# Altium PCB LV1.PCBDOC
Units mm, origin at the board's own origin, x right, y up, seen from the top; angles counter-clockwise.
Board outline 116.26 x 66.29 mm, 2 copper layers (Component Side, Bottom Layer), stack 0.325 mm thick; 98 components, 63 nets, 316 pads, 91 vias.
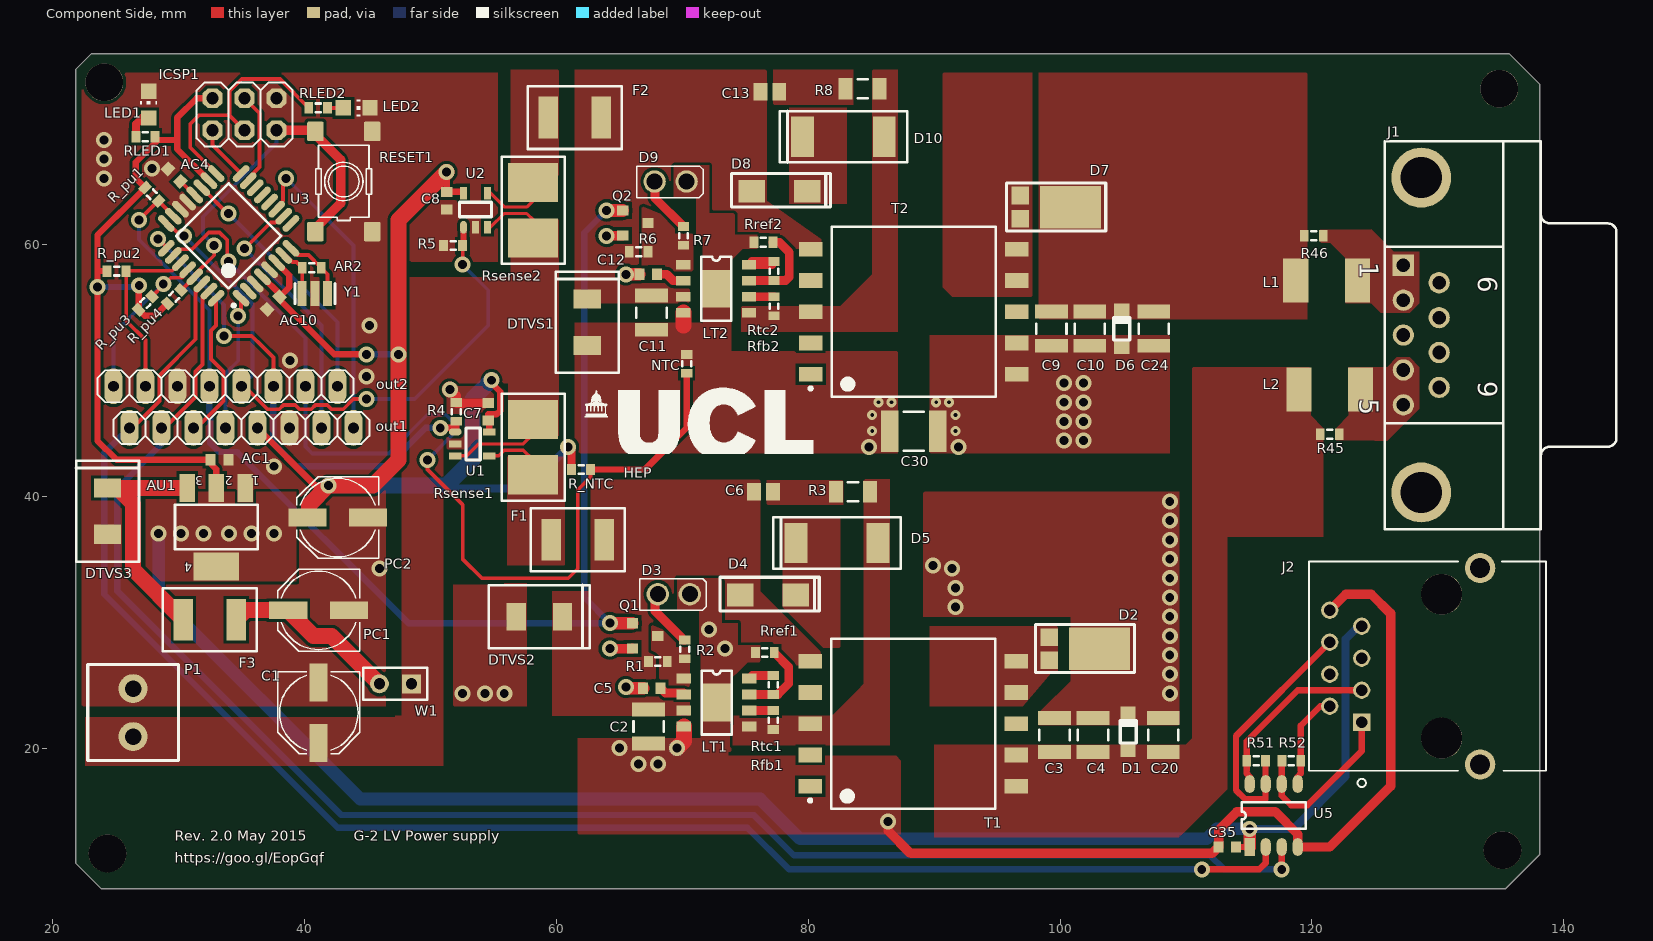
[diagram p0: Component Side view]
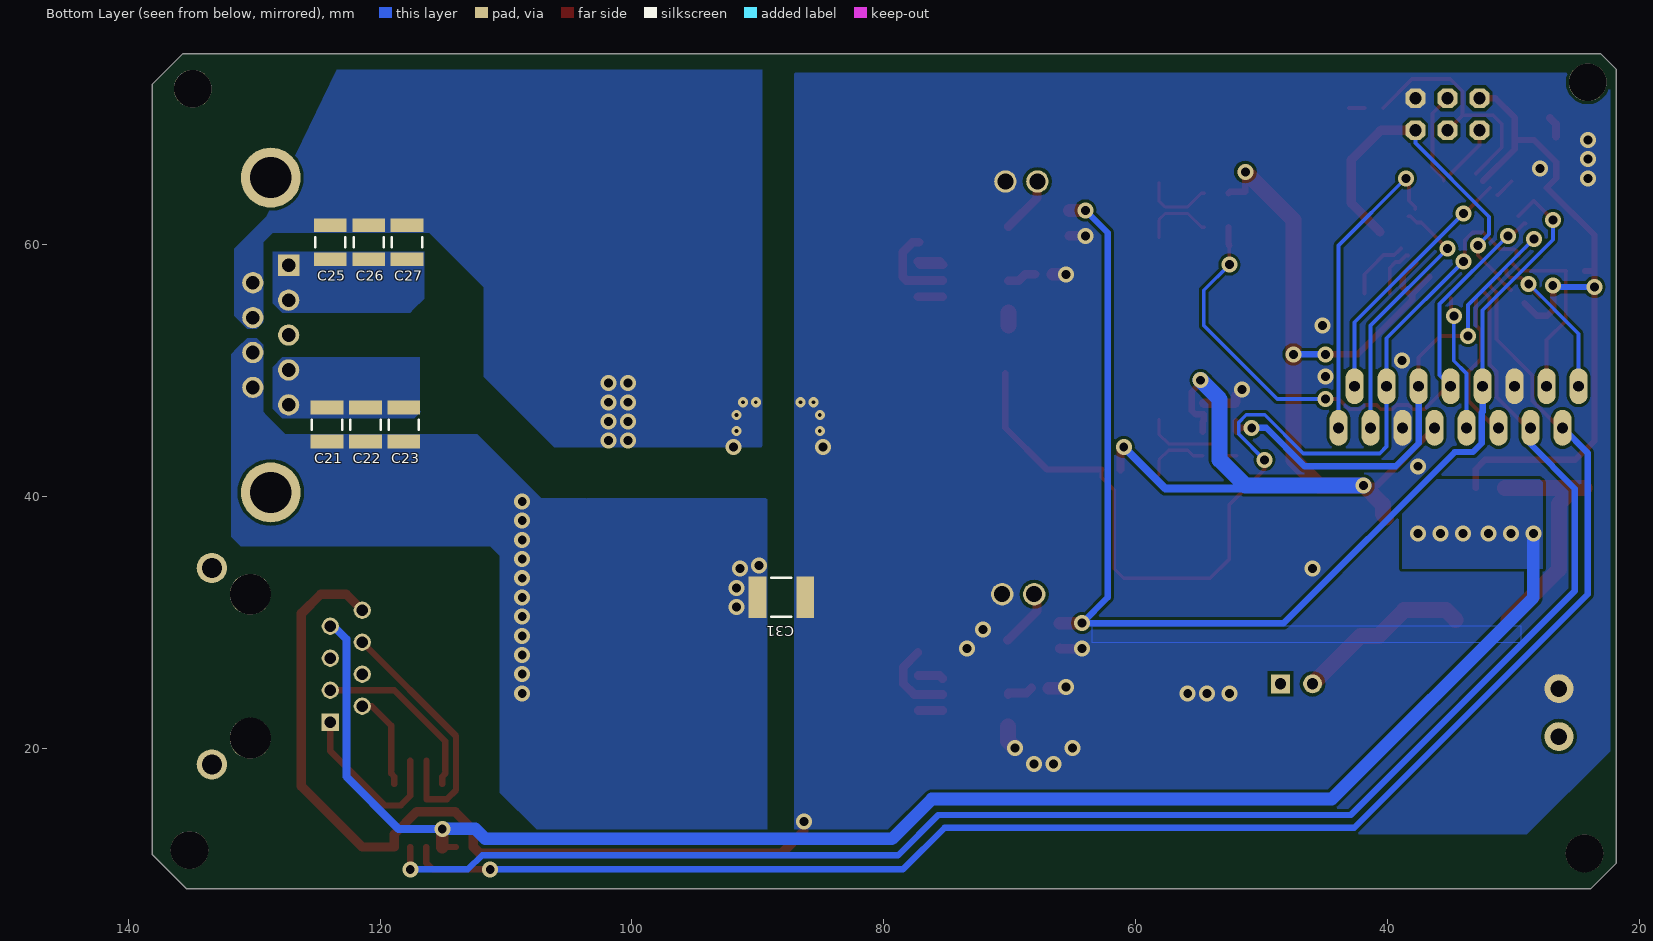
[diagram p1: Bottom Layer view, seen from below]

## Layer stack, top to bottom
Top Solder: solder mask 0.0102, Solder Resist, Dk 3.5
Component Side: signal copper 0.0356
Dielectric 1: core 0.254, FR-4, Dk 4.2
Bottom Layer: signal copper 0.0356
Solder Side: solder mask 0.0102, Solder Resist, Dk 3.5

## Board outline
21.844,10.922 21.844,73.914 23.114,75.184 135.636,75.184 138.102,72.718 138.102,11.61 135.382,8.89 23.876,8.89

## Design rules (kind name [scope] priority, off if disabled: settings)
Clearance [All] p1: gap=0.25
FabricationTestPointUsage TestPointUsage [All] p1: valid=0 allowmultiple=FALSE
FabricationTestpoint Testpoint [All] p1: side=3 testpointundercomponent=TRUE minsize=1.016 maxsize=2.54 preferedsize=1.524 minholesize=0.508 maxholesize=1.016 preferedholesize=0.813 testpointgrid=0.025 allowsidetop=TRUE allowsidebottom=TRUE usegrid=TRUE gridtolerance=0
PlaneClearance [All] p1: clearance=0.254
PolygonConnect [All] p1: connectstyle=Direct reliefconductorwidth=0.254 reliefentries=4 polygonreliefangle="90 Angle" airgapwidth=0.254
RoutingVias [All] p1: holewidth=0.711 width=1.27 viastyle="Through Hole" minholewidth=0.711 minwidth=1.27 maxholewidth=0.711 maxwidth=1.27
SilkToSolderMaskClearance SilkscreenOverComponentPads [IsPad] p1: minsilkscreentomaskgap=0.254 clearancetoexposedcopper=TRUE
SolderMaskExpansion [All] p1: expansion=0.051
Width Width_1 [InNet('ISENSE_2') OR InNet('ISENSE_1') OR InNet('NEGISENSE_2') OR InNet('NEGISENSE_1') OR InNet('L_OUT+') OR InNet('L_OUT-') OR InNet('NEGL_OUT+') OR InNet('NEGL_OUT-') OR InNet('SW')] p1: maxlimit=2 minlimit=0.254 preferedwidth=1 minimp=50.000000 maximp=50.000000 favimp=50.000000
Width [All] p2: maxlimit=2 minlimit=0.254 preferedwidth=0.254 minimp=50.000000 maximp=50.000000 favimp=50.000000
26 further rules are at their usual default settings.

## Classes and differential pairs
component class LV1: C2 C3 C4 C5 C6 C9 C10 C11 C12 C13 C16 C17 C18 C19 C20 C21 C22 C23 C24 C25 C26 C27 C30 C31 D1 D2 D3 D4 D5 D6 D7 D8 D9 D10 J1 L1 L2 LT1 LT2 Q1 Q2 R1 R2 R3 R6 R7 R8 R9 R10 R45 R46 Rfb1 Rfb2 Rref1 Rref2 Rtc1 Rtc2 T1 T2
component class controller: AC1 AC3 AC4 AC10 AR1 AR2 AU1 C1 C7 C8 C35 DTVS1 DTVS2 DTVS3 F1 F2 F3 ICSP1 J2 LED1 LED2 NTC NTC1 out1 out2 P1 PC1 PC2 R4 R5 R51 R52 R_NTC R_NTC1 R_pu1 R_pu2 R_pu3 R_pu4 RESET1 RLED1 RLED2 Rsense1 Rsense2 U1 U2 U3 U5 W1 Y1

## Components (designator, comment, footprint, x,y, rotation, side; value= is the part's Value field where it differs from the comment)
AC1 "100n" 1608[0603] 33.274,42.926 r180 top (schematic designator AC2)
AC4 "Cap Semi" 1608[0603] 29.678,65.532 r315 top
AC10 "Cap Semi" 1608[0603] 37.552,55.372 r45 top
AR2 "" J1-0603 40.6,58.166 r0 top
AU1 "LM2940IMP-5.0/NOPB" SOT223 33.02,37.592 r180 top
C1 "" PANASONIC_D 41.148,22.86 r270 top
C2 "Cap Semi" C1210 67.34,21.758 r90 top (schematic designator C14)
C3 "Cap Semi" C1210 99.568,21.082 r90 top (schematic designator C18)
C4 "Cap Semi" C1210 102.616,21.082 r90 top (schematic designator C17)
C5 "Cap Semi" 1608[0603] 67.594,24.806 r180 top (schematic designator C15)
C6 "Cap Semi" C0805 76.454,40.386 r180 top (schematic designator C16)
C7 "Cap Semi" 1608[0603] 54.61,46.736 r270 top (schematic designator C21)
C8 "Cap Semi" 1608[0603] 51.308,63.5 r90 top (schematic designator C20)
C9 "Cap Semi" C1210 99.314,53.34 r90 top (schematic designator C5)
C10 "Cap Semi" C1210 102.362,53.34 r90 top (schematic designator C6)
C11 "Cap Semi" C1210 67.564,54.61 r90 top (schematic designator C2)
C12 "Cap Semi" 1608[0603] 67.31,57.658 r180 top (schematic designator C3)
C13 "Cap Semi" C0805 76.962,72.136 r180 top (schematic designator C4)
C20 "Cap Semi" C1210 108.204,21.082 r90 top
C21 "Cap Semi" C1210 124.206,45.72 r270 bottom
C22 "Cap Semi" C1210 121.158,45.72 r270 bottom
C23 "Cap Semi" C1210 118.11,45.72 r270 bottom
C24 "Cap Semi" C1210 107.442,53.34 r90 top
C25 "Cap Semi" C1210 123.952,60.198 r270 bottom
C26 "Cap Semi" C1210 120.904,60.198 r270 bottom
C27 "Cap Semi" C1210 117.856,60.198 r270 bottom
C30 "Cap Semi" 1812 88.392,45.212 r0 top
C31 "Cap Semi" 1812 88.138,32.004 r0 bottom
C35 "Cap Semi" 1608[0603] 113.284,12.192 r0 top
D1 "BZT52H-B5V6" SOD123F 105.41,21.336 r270 top (schematic designator D10)
D2 "PDS1040L" PDS1040L 103.124,27.94 r270 top
D3 "LED0" LED-0 69.342,32.258 r180 top
D4 "SMAJ30A" DO-214AC 76.818,32.204 r180 top (schematic designator D7)
D5 "ES3B" DO-214AB 82.296,36.322 r0 top (schematic designator D8)
D6 "BZT52H-B5V6" SOD123F 104.902,53.34 r270 top (schematic designator D1)
D7 "PDS1040L" PDS1040L 100.838,62.992 r270 top
D8 "SMAJ30A" DO-214AC 77.724,64.262 r180 top (schematic designator D3)
D9 "LED0" LED-0 69.088,65.024 r180 top
D10 "ES3B" DO-214AB 82.804,68.58 r0 top (schematic designator D4)
DTVS1 "SMBJ24A-E3/52" DO-214AA 62.484,53.848 r270 top (schematic designator DTVS)
DTVS2 "SMBJ" DO-214AA 58.674,30.48 r180 top
DTVS3 "SMBJ" DO-214AA 24.384,38.862 r270 top
F1 "MINISMDC050F-2" MF-MSMF1 61.722,36.576 r0 top (schematic designator F2)
F2 "MF-MSMF075-2" MF-MSMF1 61.468,70.104 r0 top (schematic designator F1)
F3 "MINISMDC050F-2" MF-MSMF1 32.512,30.226 r180 top
ICSP1 "3x2 M" 2X03 35.266,70.358 r0 top (schematic designator ICSP)
J1 "D Connector 9" DSUB1.385-2H9 138.176,52.832 r270 top (schematic designator J3)
J2 "CONNECTOR, RJ45, JACK, 8P8C, 1PORT, CAT5E" MOLEX_85505-5113 123.952,22.098 r90 top
L1 "Inductor" MPLC0730 121.158,57.15 r180 top
L2 "Inductor" MPLC0730 121.412,48.514 r180 top
LED1 "GREEN" CHIP-LED0805 27.646,71.12 r0 top
LED2 "GREEN" CHIP-LED0805 44.156,70.866 r270 top
LT1 "LT8302" S8E 70.134,25.568 r0 top (schematic designator LT8302_2)
LT2 "LT8302" S8E 70.104,58.42 r0 top (schematic designator LT8302)
NTC "" J1-0603 70.358,50.546 r270 top
out1 "" 1X08 35.012,45.466 r0 top
out2 "" 1X08 33.742,48.768 r0 top
P1 "WiretoBoard" MC000044 26.416,22.86 r90 top
PC1 "<B>POLARIZED CAPACITOR</B>, European symbol" PANASONIC_D 41.148,30.988 r180 top
PC2 "<B>POLARIZED CAPACITOR</B>, European symbol" PANASONIC_D 42.672,38.354 r180 top
Q1 "BSS131" SOT-23#1 67.056,28.956 r180 top (schematic designator Q2)
Q2 "BSS131" SOT-23#1 66.294,61.722 r180 top (schematic designator Q1)
R1 "Res3" J1-0603 68.072,26.924 r180 top (schematic designator R13)
R2 "Res3" J1-0603 70.214,27.886 r270 top (schematic designator R14)
R3 "Res3" C1206 83.566,40.386 r180 top (schematic designator R15)
R4 "Res3" J1-0603 52.07,46.736 r270 top (schematic designator R17)
R5 "Res3" J1-0603 51.816,59.944 r0 top (schematic designator R8)
R6 "Res3" J1-0603 66.548,59.436 r180 top (schematic designator R1)
R7 "Res3" J1-0603 70.104,60.706 r270 top (schematic designator R2)
R8 "Res3" C1206 84.328,72.39 r180 top (schematic designator R3)
R45 "Res3" J1-0603 121.412,44.958 r0 top
R46 "Res3" J1-0603 120.142,60.706 r0 top
R51 "" J1-0603 115.57,19.05 r180 top
R52 "" J1-0603 118.364,19.05 r180 top
R_NTC "" J1-0603 61.976,42.164 r180 top
R_pu1 "pullup" J1-0603 27.9,64.008 r135 top (schematic designator R_pu)
R_pu2 "pullup" J1-0603 25.106,57.912 r180 top
R_pu3 "pullup" J1-0603 27.392,55.372 r225 top
R_pu4 "pullup" J1-0603 29.678,55.88 r225 top
RESET1 "" B3S-1002 43.14,65.024 r90 top
Rfb1 "Res3" J1-0603 77.246,22.266 r270 top (schematic designator Rfb2)
Rfb2 "Res3" J1-0603 77.299,55.118 r270 top (schematic designator Rfb)
RLED1 "" J1-0603 27.392,68.58 r180 top (schematic designator RLED)
RLED2 "" J1-0603 41.108,70.866 r180 top
Rref1 "Res3" J1-0603 76.564,27.632 r180 top (schematic designator Rref2)
Rref2 "Res3" J1-0603 76.454,60.198 r180 top (schematic designator Rref)
Rsense1 "Rsense" R6432 58.166,43.942 r270 top
Rsense2 "Rsense" R6432 58.166,62.738 r90 top
Rtc1 "Res3" J1-0603 77.246,25.06 r270 top (schematic designator Rtc2)
Rtc2 "Res3" J1-0603 77.299,57.912 r270 top (schematic designator Rtc)
T1 "36V" EP13 88.34,21.978 r180 top (schematic designator T2)
T2 "36V" EP13 88.38,54.69 r180 top (schematic designator T1)
U1 "INA138" SOT-23#2 53.34,44.196 r270 top (schematic designator U3)
U2 "INA138" SOT-23#2 53.594,62.738 r0 top
U3 "ATmega328P-AU" 32A_N 33.996,60.706 r135 top
U5 "SP3084EEN-L" SOICN8 115.062,12.192 r90 top
W1 "Jumper" HDR1X2 48.514,25.146 r180 top
Y1 "" RESONATOR 40.854,56.134 r180 top (schematic designator Y2)

## Footprints (in the part's own frame and the unit in brackets; to place one, negate y for a bottom-side part, rotate by r counter-clockwise, add the part's x,y. Pads: shape width x height; smd on the part's side, far side on the other; paste and mask are expansions set on the pad)
1X08 [mil]
  oval 56x112 hole 34: 1(-350,0) 2(-250,0) 3(-150,0) 4(-50,0) 5(50,0) 6(150,0) 7(250,0) 8(350,0)
  silkscreen extent -400,-50 400,50
2X03 [mil]
  oct 62x62 hole 38: 1(-100,-50) 2(-100,50) 3(0,-50) 4(0,50) 5(100,-50) 6(100,50)
  silkscreen extent -150,-100 150,100
32A_N [mm] "Thin QFP, 32-Leads, Body 7x7mm, Pitch 0.8mm, IPC Medium Density"
  oval 1.65x0.55 smd: 1(-4.2,2.8) 2(-4.2,2) 3(-4.2,1.2) 4(-4.2,0.4) 5(-4.2,-0.4) 6(-4.2,-1.2) 7(-4.2,-2) 8(-4.2,-2.8) 17(4.2,-2.8) 18(4.2,-2) 19(4.2,-1.2) 20(4.2,-0.4) 21(4.2,0.4) 22(4.2,1.2) 23(4.2,2) 24(4.2,2.8)
  oval 0.55x1.65 smd: 9(-2.8,-4.2) 10(-2,-4.2) 11(-1.2,-4.2) 12(-0.4,-4.2) 13(0.4,-4.2) 14(1.2,-4.2) 15(2,-4.2) 16(2.8,-4.2) 25(2.8,4.2) 26(2,4.2) 27(1.2,4.2) 28(0.4,4.2) 29(-0.4,4.2) 30(-1.2,4.2) 31(-2,4.2) 32(-2.8,4.2)
  silkscreen extent -4.32,-2.95 2.95,3.75, body extent -3.5,-3.5 3.5,3.5, height 1.2
1608[0603] [mm] "Chip Capacitor, Body 1.6x0.8mm, IPC High Density"
  rect 0.8x0.9 smd: 1(-0.7,0) 2(0.7,0)
  body extent -0.87,-0.48 0.87,0.48, height 1.3
1812 [mm] "Chip Capacitor, Body 4.5x3.2mm, IPC High Density"
  rect 1.4x3.3 smd: 1(-1.9,0) 2(1.9,0)
  silkscreen extent -0.8,-1.55 0.8,1.55, body extent -2.4,-1.7 2.4,1.7, height 1.4
B3S-1002 [mm]
  rrect15% 1.55x1.3 smd: 1(3.975,-2.25) 2(-3.975,-2.25) 3(3.975,2.25) 4(-3.975,2.25)
  silkscreen extent -3.1,-2.2 2.87,2.21
C0805 [mm] "Chip Capacitor, Body 2.0x1.3mm, IPC High Density"
  rect 1.1x1.4 smd: 1(-0.75,0) 2(0.75,0)
  body extent -1.1,-0.72 1.1,0.72, height 1.4
C1206 [mm] "Chip Capacitor, Body 3.2x1.6mm, IPC High Density"
  rect 1.1x1.7 smd: 1(-1.35,0) 2(1.35,0)
  silkscreen extent -0.4,-0.75 0.4,0.75, body extent -1.7,-0.9 1.7,0.9, height 1.3
C1210 [mm] "Chip Capacitor, Body 3.2x2.5mm, IPC High Density"
  rect 1.1x2.6 smd: 1(-1.35,0) 2(1.35,0)
  silkscreen extent -0.4,-1.2 0.4,1.2, body extent -1.7,-1.35 1.7,1.35, height 1.3
CHIP-LED0805 [mil]
  rect 48x48 smd: A(0,-41.34) C(0,42)
  silkscreen extent -27,0 27,12
DO-214AA [mm]
  rect 1.52x2.18 smd: 1(-1.84,0) 2(1.84,0)
  silkscreen extent -4.01,-2.5 4.01,2.5
DO-214AB [mm]
  rect 1.8x3.2 smd: 1(-3.25,0) 2(3.25,0)
  silkscreen extent -5.05,-2.03 5.05,2.03
DO-214AC [mm] "LED; 2 Leads"
  rect 2.1x1.8 smd: 1(2.2,0) 2(-2.2,0)
  silkscreen extent -4.06,-1.4 3.81,1.27
DSUB1.385-2H9 [mm] "Connector; D Subminiature; 9 Position; Right Angle; Pitch 1.385 mm"
  rect 1.69x1.69 hole 1.09: 1(-5.54,-10.92)
  round 1.69 hole 1.09: 2(-2.77,-10.92) 3(0,-10.92) 4(2.77,-10.92) 5(5.54,-10.92) 6(-4.155,-8.08) 7(-1.385,-8.08) 8(1.385,-8.08) 9(4.155,-8.08)
  round 4.76 hole 3.26: 10(-12.495,-9.5) 11(12.495,-9.5)
  silkscreen extent -15.4,-12.4 15.4,6, body extent -15.28,-12.85 15.53,6.22, height 12.55
EP13 [mm] "SMD, 10-Leads, Body 13.5x14.0mm (max), Pitch 2.48mm, IPC Medium Density"
  rect 1.88x1.17 smd: 1(8.18,4.96) 2(8.18,2.48) 3(8.18,0) 4(8.18,-2.48) 5(8.18,-4.96) 6(-8.18,-4.96) 7(-8.18,-2.48) 8(-8.18,0) 9(-8.18,2.48) 10(-8.18,4.96)
  silkscreen extent -6.5,-6.75 8.3,6.75, body extent -8.88,-6.75 8.87,6.75, height 12.5
HDR1X2 [mm] "Connector; Header; 2 Position"
  rect 1.5x1.5 hole 0.9: 1(0,0)
  round 1.5 hole 0.9: 2(2.54,0)
  silkscreen extent -1.27,-1.27 3.81,1.27
J1-0603 [mm] "Chip Resistor, Body 1.6x0.8mm, IPC High Density"
  rect 0.7x0.9 smd: 1(-0.75,0) 2(0.75,0)
  silkscreen extent -0.2,-0.35 0.2,0.35, body extent -0.85,-0.48 0.85,0.48, height 0.9
LED-0 [mil] "LED; 2 Leads"
  round 70 hole 50: 1(50,0) 2(-50,0)
  silkscreen extent -101,-48 106,50
MC000044 [mm]
  round 2.3 hole 1.3: 1(-1.905,0) 2(1.905,0)
  silkscreen extent -3.81,-3.6 3.81,3.6
MF-MSMF1 [mm]
  rect 1.55x3.3 smd: 1(-2.1,0) 2(2.1,0)
  silkscreen extent -3.72,-2.5 3.73,2.5
MOLEX_85505-5113 [mil]
  round 128 hole 128: 0(-50,-250) 0(400,-250)
  rect 54x54 hole 36: 1(0,0)
  round 54 hole 36: 2(50,100) 3(100,0) 4(150,100) 5(200,0) 6(250,100) 7(300,0) 8(350,100)
  round 94.5 hole 63: M1(-131.89,-370.08) M2(482,-370.08)
  silkscreen extent -203,-576 502,165, body extent -149,-580 505,160, height 512
MPLC0730 [mm]
  rect 2x3.5 smd: 1(2.45,0) 2(-2.45,0)
  body extent -3.18,-2.67 3.18,2.79, height 2
PANASONIC_D [mil]
  rect 119x56 smd: 1(95,0) 2(-94.49,0)
  silkscreen extent -128,-128 128,128, body extent -130,-125 125,125, height 236
PDS1040L [mm]
  rect 1.39x1.4 smd: 1(-0.92,-3.982) 1(0.92,-3.982)
  rect 3.36x4.86 smd: 2(0,0)
  silkscreen extent -1.91,-5.08 1.91,2.79, body extent -1.52,-4.06 1.52,2.29, height 1
R6432 [mm]
  rect 3.1x4 smd: 1(-2.2,0) 2(2.2,0)
  silkscreen extent -4.25,-2.5 4.25,2.5
RESONATOR [mil]
  rect 28x79 smd: 1(-39.37,0) 2(0,0) 3(40,0)
  silkscreen extent -63,-31 63,32
S8E [mil]
  rect 45x30 smd: 1(0,0) 2(0,-50) 3(0,-100) 4(0,-150) 5(205,-150) 6(205,-100) 7(205,-50) 8(205,0)
  rect 89x118 smd: 4(102.5,-75)
  silkscreen extent 55,-175 149,25
SOD123F [mm]
  rect 1.2x1.2 smd: 1(-1.4,0) 2(1.4,0)
  silkscreen extent -1.02,-0.64 0.89,0.64
SOICN8 [mm]
  rect 1.4x0.8 smd: 1(0,0)
  oval 1.4x0.8 smd: 2(0,-1.27) 3(0,-2.54) 4(0,-3.81) 5(5,-3.81) 6(5,-2.54) 7(5,-1.27) 8(5,0)
  silkscreen extent 1.43,-4.44 3.57,0.64, body extent -0.38,-4.7 5.46,0.89, height 1
SOT223 [mil]
  rect 48x88 smd: 1(-91,-122) 2(0,-122) 3(91,-122)
  rect 142x87 smd: 4(0,123)
  silkscreen extent -129,-70 129,70
SOT-23#1 [mm]
  rect 0.9x0.8 smd: 1(1,-1) 2(1,1) 3(-1,0)
  body extent -0.89,-1.02 1.02,1.14, height 0.5
SOT-23#2 [mm]
  oval 0.55x1 smd: 1(-0.95,-1.35)
  rect 0.55x1 smd: 2(0,-1.35) 3(0.95,-1.35) 4(0.95,1.35) 5(-0.95,1.35)
  silkscreen extent -1.27,-0.51 1.27,0.64

## Part data
AC1: library part "Cap Semi", "Capacitor (Semiconductor SIM Model)"
AC4 AC10 C3 C4 C5 C7 C8 C9 C10 C11 C12 C13 C20 C21 C22 C23 C24 C25 C26 C27 C30 C31 C35: "Capacitor (Semiconductor SIM Model)"
AR2 NTC R51 R52 R_NTC R_pu1 R_pu2 R_pu3 R_pu4 RLED1 RLED2: library part Res3, "Resistor"
AU1: library part MC33269ST*, "1469076"
C1 PC1 PC2: library part CPOL-EUD
D1 D6: "Zener Diode"
D2 D7: "Schottky Diode"
D3 D9: "Typical INFRARED GaAs LED"
D4 D8: library part "D Zener", "Zener Diode"
D5 D10: "Power Diode"
DTVS1: library part SMBJ, "TVS"
DTVS2 DTVS3: "TVS"
F1 F2 F3: library part "Fuse 1", "Fuse"
ICSP1: library part PINHD-2X3
J1: "Receptacle Assembly, 9 Position, Right Angle"
J2: library part 85505-5113
LED1 LED2: library part LEDCHIP-LED0805
out1 out2: library part PINHD-1X8
Q1 Q2: "N-Channel MOSFET"
R1 R2 R3 R4 R5 R6 R7 R8 R45 R46 Rfb1 Rfb2 Rref1 Rref2 Rtc1 Rtc2: "Resistor"
RESET1: library part TS42
Rsense1 Rsense2: "CRF2512-FV-R001ELF"
T1: library part "WE-FB, 750311457", "Flyback Transformer"
T2: library part "WE-FB, 750311457", "Flyback Transformer suitable or LT3573/ LT3574/ LT3575/ LT3748 WE-FB, Ui=36V"
U3: "8-bit AVR Microcontroller, 32KB Flash, 1KB EEPROM, 2KB SRAM, 32-pin TQFP, Industrial Grade (-40°C to 85°C)"
W1: library part "Header 2", "Header, 2-Pin"
Y1: library part RESONATORMU

## Free pads (board coordinates)
  round 3 hole 3 unplated: 1(24.13,72.898) 1(24.384,11.684) 1(134.874,72.39) 1(135.128,11.938)

## Via types
v1: diameter 1.27, hole 0.711, Component Side to Bottom Layer, 83 vias
v2: diameter 0.8, hole 0.3, Component Side to Bottom Layer, 8 vias

## Nets (pads, with @x,y where several pads share a name; then routed paths per layer and width w, separated by ;. In a path a pad name is that pad's centre, name@x,y a point inside that pad or via, vN(x,y) a via of type N, cw(c..) or ccw(c..) an arc to the next point about the centre after c; other vN are vias at no path point)
24V+: C11.2 C13.2 D8.1 DTVS1.1 F2.2 LT2.3 R6.2 T2.5
24V-: C2.2 C6.2 D4.1 DTVS2.1 F1.2 LT1.3 R1.2 T1.5
+5V: AC1.2 AC10.2 AU1.2 AU1.4 C7.2 C8.2 C35.2 ICSP1.2 J2.7 out1.5 PC2.1 R_NTC.2 R_pu1.2 R_pu2.2 R_pu3.2 R_pu4.2 RLED1.1 U1.5 U2.5 U3.4 U3.6 U3.18 U5.1 | length 286.3
  Component Side w0.5: R_pu2.2@24.344,57.912 23.582,57.912 ; 25.106,62.275 R_pu1.2 ; v1(26.903,56.771) 26.857,56.725 26.857,54.847 R_pu3.2 26.862,54.837 27.342,54.356 28.154,54.356 R_pu4.2 ; U3.18 29.932,67.598 29.932,68.326 ; ICSP1.2 31.456,71.628 29.932,70.104 29.932,68.326 ; AU1.2 33.02,42.186 32.28,42.926 25.106,42.926 23.582,44.45 23.582,57.912 ; out1.5 40.854,40.894 v1(41.91,40.894) ; U3.4 38.047,56.089 AC10.2 ; U3.6 38.822,57.577 38.822,56.642 AC10.2 ; v1(44.937,51.308) 42.378,51.308 38.047,55.639 AC10.2 ; v1(51.308,65.786) C8.2 52.532,64.2 U2.5 ; U1.5 54.69,45.956 C7.2 54.61,46.536 55.267,46.536 55.56,46.829 55.56,48.336 54.864,49.032 v1(54.864,49.247) ; C35.2 U5.1 ; 23.582,57.912 23.582,60.751 R_pu1.2 ; R_pu1.2 26.63,65.278 26.63,66.548 28.408,68.326 29.932,68.326
  Component Side w0.635: v1(60.96,43.942) 61.226,43.676 R_NTC.2
  Component Side w1: U5.1 v1(115.062,13.627)
  Component Side w1.27: PC2.1@40.132,38.354 40.386,38.608 40.386,39.37 v1(41.91,40.894) 45.466,40.894 47.498,42.926 v1(47.498,51.308) 47.498,61.976 v1(51.308,65.786)
  Bottom Layer w0.5: v1(23.582,56.642) 26.774,56.642 v1(26.903,56.771) ; v1(44.937,51.308) v1(47.498,51.308) ; v1@54.312,49.247 v1(54.864,49.247)
  Bottom Layer w0.635: 50.546,40.64 57.658,40.64 v1(60.96,43.942) ; v1(115.062,13.627) 118.529,13.627 122.682,17.78 122.682,28.702 123.698,29.718 J2.7
  Bottom Layer w1: v1(28.448,37.084) 28.448,32.004 44.45,16.002 76.2,16.002 79.363,12.839 111.645,12.839 112.433,13.627 v1(115.062,13.627)
  Bottom Layer w1.27: v1(41.91,40.894) 51.308,40.894 53.34,42.926 53.34,47.723 v1(54.864,49.247)
  other v1: 30.226,37.084 32.004,37.084 34.036,37.084 35.814,37.084 37.592,37.084
+LV: C25.2 C26.2 C27.2 J1.1 J1.2 L1.2 R46.2
-LV: C21.1 C22.1 C23.1 J1.4 J1.5 L2.2 R45.2
A3: NTC.2 out2.7 R_NTC.1 U3.26 | length 82.5
  Component Side w0.3: U3.26 29.789,59.15 29.789,59.504 29.933,59.649 31.094,59.649 32.424,60.979 33.282,60.979 33.888,60.373 33.888,58.782 v1(33.996,58.674) ; v1(49.784,42.926) 49.784,42.164 52.578,39.37 52.578,35.052 54.102,33.528 60.96,33.528 61.72,34.288 61.72,40.54 62.726,41.546 R_NTC.1
  Component Side w0.508: R_NTC.1 67.056,42.164 70.358,45.466 NTC.2
  Bottom Layer w0.3: v1(33.996,58.674) 40.092,52.578 out2.7 40.092,43.982 40.64,43.434 46.706,43.434 49.773,46.501 51.229,46.501 51.835,45.895 51.835,44.977 v1(49.784,42.926)
A6: out2.8 U3.19 | length 20.3
  Component Side w0.3: U3.19 33.915,62.484 v1(33.996,62.484)
  Bottom Layer w0.3: v1(33.996,62.484) 42.632,53.848 out2.8
ADC1: out2.5 R5.2 U2.1 U3.24 | length 48.7
  Component Side w0.3: U3.24 29.196,61.696 30.179,60.713 v1(30.468,60.713) ; out2.5 35.263,48.768 37.085,46.946 38.012,46.946 38.355,47.288 39.282,47.288 39.625,46.946 40.552,46.946 40.895,47.288 41.822,47.288 42.165,46.946 43.092,46.946 43.899,47.752 v1(44.958,47.752) ; R5.2 52.578,59.932 v1(52.578,58.42)
  Component Side w0.5: R5.2 52.644,60.022 U2.1
  Bottom Layer w0.3: v1(30.468,60.713) 35.891,55.29 35.891,49.647 out2.5 ; v1(44.958,47.752) 48.768,47.752 54.61,53.594 54.61,56.388 v1(52.578,58.42)
ADC2: out2.6 R4.2 U1.1 U3.25 | length 39.8
  Component Side w0.3: v1(28.408,60.452) 29.046,59.814 U3.25 ; v1(33.635,52.767) 35.839,52.767 36.693,51.913 37.552,51.054 out2.6
  Component Side w0.5: v1(50.8,45.466) 51.67,45.466 U1.1 52.07,45.226 R4.2
  Bottom Layer w0.3: v1(28.408,60.452) 33.635,55.225 v1(33.635,52.767)
  Bottom Layer w0.5: out2.6 37.552,44.236 39.37,42.418 46.609,42.418 49.657,45.466 v1(50.8,45.466)
AREF: AC4.2 U3.20 | length 1.6
  Component Side w0.3: AC4.2 31.251,63.959 U3.20
D2: out1.3 U3.32 | length 12
  Component Side w0.3: out1.3 31.453,45.466 33.583,47.597 33.583,49.939 32.6,50.923 32.6,53.195 33.006,53.602 U3.32
D3: out1.4 U3.1 | length 10.8
  Component Side w0.3: v1(34.758,54.356) 34.986,54.584 U3.1
  Bottom Layer w0.3: out1.4 33.742,49.784 34.758,50.8 v1(34.758,54.356)
D4: U3.2
D5: U3.9
D6: out1.7 U3.10 | length 20.9
  Component Side w0.3: v1(35.266,59.69) 37.339,61.763 37.705,61.763 38.203,62.262 U3.10
  Bottom Layer w0.3: v1(35.266,59.69) 41.362,53.594 out1.7
D7: out1.8 U3.11 | length 24.8
  Component Side w0.3: U3.11 37.814,63.004 38.313,63.502 38.313,65.023 v1(38.568,65.278)
  Bottom Layer w0.3: v1(38.568,65.278) 43.902,59.944 out1.8
EN: out2.4 Q1.1 Q2.1 R_pu1.1 U3.23 | length 99
  Component Side w0.3: v1(26.884,61.976) 28.386,63.478 R_pu1.1 29.612,62.296 U3.23
  Component Side w1: v1(64.008,62.738) 64.024,62.722 Q2.1 ; v1(64.262,29.972) 64.278,29.956 Q1.1
  Bottom Layer w0.3: v1(26.884,61.976) 26.884,60.393 32.472,54.805 out2.4
  Bottom Layer w0.5: out2.4 32.472,46.738 32.531,46.679 32.531,44.253 33.24,43.544 34.688,43.544 48.276,29.956 v1@64.278,29.956 ; v1(64.008,62.738) 62.23,60.96 62.23,32.004 v1(64.262,29.972)
GND: AC1.1 AC4.1 AC10.1 AU1.1 C1.2 C2.1 C5.2 C7.1 C8.1 C11.1 C12.2 C30.1 C31.1 C35.1 D3.2 D9.2 DTVS1.2 DTVS2.2 DTVS3.2 ICSP1.6 J2.8 LED1.C LED2.C LT1.4 LT2.4 NTC.1 out1.6 out2.3 P1.2 PC1.2 PC2.2 Q1.2 Q2.2 R4.1 R5.1 RESET1.1 RESET1.2 Rref1.2 Rref2.2 U1.2 U2.2 U3.3 U3.5 U3.21 U3.22 U5.4 Y1.2 | length 79.2
  Component Side w0.75: v1(51.562,48.514) 52.07,48.006 R4.1 52.12,47.436 C7.1 ; v1(64.008,60.706) 65.278,60.706 Q2.2 ; v1(64.262,27.94) 66.04,27.94 Q1.2 ; v1(86.36,14.224) 86.36,13.462 88.138,11.684 112.076,11.684 C35.1 112.584,13.524 114.046,14.986 117.094,14.986 118.872,13.208 U5.4 121.412,12.192 126.238,17.018 126.238,30.734 124.714,32.258 122.682,32.258 J2.8
  Component Side w1: v1(65.532,57.658) C12.2 ; v1@65.618,24.806 C5.2
  Component Side w1.27: v1(69.596,20.066) 70.134,20.604 LT1.4@70.134,21.758 ; 70.104,53.594 LT2.4@70.104,54.61
  other v1: 66.548,18.796 68.072,18.796 65.024,20.066 52.578,24.384 54.356,24.384 55.88,24.384 65.532,24.892 73.406,27.94 72.136,29.464 45.974,34.29 37.592,42.418 84.836,43.942 44.958,49.53 38.862,50.8 45.172,53.594 24.09,65.278 27.9,66.04 24.09,66.802 24.09,68.326
  other v2: 85.09,45.212 85.09,46.482 85.598,47.498 86.614,47.498
GNDOUT: C9.1 C10.1 C24.1 C25.1 C26.1 C27.1 C30.2 D6.2 J1.6 J1.7 T2.9 T2.10
  other v1: 91.948,43.942 100.33,44.45 101.854,44.45 100.33,45.974 101.854,45.974 100.33,47.498 101.854,47.498 100.33,49.022 101.854,49.022
  other v2: 91.694,45.212 91.694,46.482 90.17,47.498 91.186,47.498
ISENSE_1: C1.1 P1.1 Rsense1.1 Rsense2.1 U1.3 U2.3 W1.1 | length 13.8
  Component Side w0.254: U1.3 52.898,43.246 53.848,44.196 57.404,44.196 58.166,44.958 Rsense1.1 ; U2.3 54.784,61.388 55.88,62.484 57.658,62.484 58.166,61.976 Rsense2.1
ISENSE_2: F2.1 Rsense2.2 U2.4 | length 5.7
  Component Side w0.254: U2.4 54.824,64.088 55.92,62.992 57.658,62.992 58.166,63.5 Rsense2.2
MISO: ICSP1.1 U3.16 | length 4.4
  Component Side w0.3: ICSP1.1 32.726,67.916 U3.16
MOSI: ICSP1.4 U3.15 | length 7.4
  Component Side w0.3: ICSP1.4 36.453,70.441 36.453,66.169 35.552,65.267 U3.15
NEGGNDOUT: C3.2 C4.2 C20.2 C21.2 C22.2 C23.2 C31.2 D1.1 D2.2 J1.8 J1.9
  other v1: 108.712,24.384 108.712,25.908 108.712,27.432 108.712,28.956 108.712,30.48 91.694,31.242 108.712,32.004 91.694,32.766 108.712,33.528 91.44,34.29 89.916,34.544 108.712,35.052 108.712,36.576 108.712,38.1 108.712,39.624
NEGISENSE_2: F1.1 Rsense1.2 U1.4 | length 5.2
  Component Side w0.254: U1.4 55.438,43.246 55.88,43.688 57.404,43.688 58.166,42.926 Rsense1.2
NEGSW: D5.2 LT1.5 R3.1 Rfb1.2 T1.3
NetAU1_3: AU1.3 DTVS3.1 F3.2 | length 19
  Component Side w1.27: DTVS3.1 DTVS3.1@25.146,40.702 ; F3.2 26.416,34.222 26.416,39.432 DTVS3.1@25.146,40.702 ; AU1.3@30.697,40.702 DTVS3.1@25.146,40.702
NetC3_1: C3.1 C4.1 C20.1 D1.2 L2.1 R45.1 T1.9 T1.10
NetC5_1: C5.1 LT1.2 | length 2.1
  Component Side w0.7: C5.1 68.692,24.408 70.134,24.408 LT1.2
NetC6_1: C6.1 R3.2
NetC9_2: C9.2 C10.2 C24.2 D6.1 D7.2 L1.1 R46.1
NetC12_1: C12.1 LT2.2 | length 2.3
  Component Side w0.7: C12.1 68.777,57.658 69.285,57.15 LT2.2
NetC13_1: C13.1 R8.2
NetD2_1: D2.1 T1.6 T1.7
NetD3_1: D3.1 R2.1 | length 4.6
  Component Side w0.7: D3.1@67.842,32.258 67.842,30.933 70.139,28.636 R2.1
NetD4_2: D4.2 D5.1
NetD7_1: D7.1 T2.6 T2.7
NetD8_2: D8.2 D10.1
NetD9_1: D9.1 R7.1 | length 4.5
  Component Side w0.7: D9.1@67.842,65.024 67.842,63.718 R7.1
NetF3_1: F3.1 PC1.1 W1.2 | length 14.1
  Component Side w1.27: F3.1 35.374,30.988 38.695,30.988 40.727,28.956 42.164,28.956 W1.2
NetJ2_1: J2.1 R52.2 U5.6 | length 13.5
  Component Side w0.5: R52.2 117.602,19.038 U5.6 117.602,16.256 118.364,15.494 118.872,15.494 119.634,15.494 123.952,19.812 J2.1
NetJ2_2: J2.2 R52.1 U5.5 | length 8.4
  Component Side w0.5: U5.5 118.872,17.78 119.126,18.034 119.126,19.038 R52.1 ; 119.114,18.288 119.114,21.832 120.65,23.368 J2.2
NetJ2_3: J2.3 R51.2 U5.8 | length 15.1
  Component Side w0.5: 114.82,18.288 114.82,20.586 118.872,24.638 J2.3 ; R51.2 114.808,19.038 114.808,18.034 115.062,17.78 U5.8
NetJ2_6: J2.6 R51.1 U5.7 | length 20.5
  Component Side w0.5: R51.1 116.32,15.992 114.689,15.992 113.97,16.711 113.97,21.006 J2.6
NetLED1_A: LED1.A RLED1.2 | length 1.7
  Component Side w0.635: RLED1.2 26.642,69.574 LED1.A@27.138,70.07
NetLED2_A: LED2.A RLED2.1 | length 1.2
  Component Side w0.3: RLED2.1 LED2.A
NetLT1_1: LT1.1 Q1.3 R1.1 R2.2
NetLT1_6: LT1.6 Rfb1.1 | length 1.9
  Component Side w0.7: LT1.6 75.353,23.016 Rfb1.1
NetLT1_7: LT1.7 Rref1.1 Rtc1.2 | length 6.4
  Component Side w0.7: LT1.7 75.353,24.31 Rtc1.2 77.607,24.31 78.47,25.173 78.47,26.476 Rref1.1
NetLT1_8: LT1.8 Rtc1.1 | length 2
  Component Side w0.7: LT1.8 75.583,25.81 Rtc1.1
NetLT2_1: LT2.1 Q2.3 R6.1 R7.2
NetLT2_6: LT2.6 Rfb2.1 | length 2
  Component Side w0.7: LT2.6@75.323,55.868 Rfb2.1
NetLT2_7: LT2.7 Rref2.1 Rtc2.2 | length 6.9
  Component Side w0.7: LT2.7@75.323,57.162 Rtc2.2 78.22,57.162 78.51,57.452 78.51,59.412 77.724,60.198 Rref2.1
NetLT2_8: LT2.8 Rtc2.1 | length 3.9
  Component Side w0.7: Rtc2.1@77.141,58.42 LT2.8 75.553,58.662 Rtc2.1
RESET: ICSP1.5 R_pu4.1 RESET1.3 RESET1.4 U3.29 | length 29.3
  Component Side w0.3: R_pu4.1 30.266,56.41 U3.29 31.309,57.63 32.853,59.174 v1(32.853,59.944)
  Component Side w0.75: ICSP1.5 40.547,69.088 40.636,68.999 42.886,66.749 42.886,63.299 RESET1.4@40.636,61.049
  Bottom Layer w0.3: v1(32.853,59.944) 31.964,60.833 31.964,62.23 37.806,68.072 ICSP1.5
RX: out1.1 U3.30 U5.2 | length 130.7
  Component Side w0.3: out1.1 26.373,45.466 28.503,47.597 28.503,49.622 31.376,52.495 31.376,56.213 31.875,56.711 U3.30
  Component Side w0.5: v1(111.252,10.414) 115.824,10.414 116.332,10.922 U5.2
  Bottom Layer w0.5: out1.1 24.13,43.474 24.13,32.258 42.672,13.716 75.184,13.716 78.486,10.414 v1(111.252,10.414)
SCK: ICSP1.3 RLED2.2 U3.17 | length 19.4
  Component Side w0.3: U3.17 30.948,67.714 30.948,69.596 31.627,70.275 34.079,70.275 ; ICSP1.3 34.079,70.275 ; RLED2.2 38.072,73.152 35.043,73.152 34.079,72.187 34.079,70.275
SCL: out2.1 R_pu3.1 U3.28 | length 13.7
  Component Side w0.3: R_pu3.1 28.809,56.789 v1(28.809,56.899) 28.919,56.899 29.404,57.384 30.285,57.384 30.567,57.665 30.567,58.019 U3.28
  Bottom Layer w0.3: out2.1 24.852,52.942 v1(28.809,56.899)
SDA: out2.2 R_pu2.1 U3.27 | length 14.4
  Component Side w0.3: R_pu2.1@25.856,57.934 29.527,57.934 U3.27 ; R_pu2.1@25.868,57.912 R_pu2.1 25.868,57.9 25.868,53.958 27.392,52.434 out2.2
SW: D10.2 LT2.5 R8.1 Rfb2.2 T2.3
TX: out1.2 U3.31 U5.3 | length 130.4
  Component Side w0.3: out1.2 28.916,45.466 31.361,47.911 31.361,49.939 31.926,50.505 31.926,55.808 U3.31
  Component Side w0.5: v1(117.602,10.414) U5.3
  Bottom Layer w0.5: out1.2 28.662,44.156 25.146,40.64 25.146,32.512 42.926,14.732 75.692,14.732 78.875,11.549 111.895,11.549 113.03,10.414 v1(117.602,10.414)
XTAL1: AR2.1 U3.7 Y1.3 | length 3.9
  Component Side w0.3: U3.7 38.557,59.15 39.075,58.632 39.384,58.632 AR2.1 39.838,58.154 Y1.3
XTAL2: AR2.2 U3.8 Y1.1 | length 5.7
  Component Side w0.3: U3.8@39.226,59.436 U3.8 39.48,59.182 40.334,59.182 AR2.2 41.854,57.662 Y1.1
pads on no net: J1.3 J1.10 J1.11 J2.0 J2.4 J2.5 J2.M1 J2.M2 T1.1 T1.2 T1.4 T1.8 T2.1 T2.2 T2.4 T2.8 U3.12 U3.13 U3.14

## Polygon pours and split planes (outlines as drawn)
NetC3_1 on Component Side "Component Side-No Net" (solid, pour order 101): 110.49,50.292 110.49,20.828 109.982,20.32 109.474,20.32 109.474,12.954 113.284,16.764 113.284,19.812 113.284,20.32 113.284,50.292
24V- on Component Side "Component Side-No Net" (solid, pour order 50): 59.69,28.448 59.69,32.512 63.246,32.512 63.246,22.606 59.69,22.606
ISENSE_1 on Component Side "Component Side-No Net" (solid, pour order 67): 60.198,61.976 60.198,44.704 60.094,44.808 56.2,44.808 56.2,48.956 56.134,49.022 47.244,49.022 47.244,57.912 56.134,57.912 56.134,61.976
NEGISENSE_2 on Component Side "Component Side-No Net" (solid, pour order 65): 56.134,43.18 60.666,43.18 60.666,34.584 60.706,34.544 56.134,34.544
GND on Component Side "Component Side-No Net" (solid, pour order 61): 61.722,17.526 61.722,13.208 87.376,13.208 87.376,17.526 87.376,19.05 86.994,19.432 73.66,19.432 70.74,19.432 68.834,17.526
NetD2_1 on Component Side "Component Side-No Net" (solid, pour order 60): 89.662,29.718 89.662,23.368 97.028,23.368 99.314,26.035 99.822,26.162 99.822,29.718
GND on Component Side "Component Side-No Net" (solid, pour order 98): 22.352,73.66 57.658,73.66 57.658,23.368 22.352,23.368
GND on Component Side "Component Side-No Net" (solid, pour order 89): 61.468,49.486 61.468,53.804 66.339,53.804 71.628,53.804 71.628,49.485
ISENSE_1 on Component Side "Component Side-No Net" (solid, pour order 97): 22.606,22.499 50.506,22.499 50.506,18.649 22.606,18.649
24V- on Component Side "Component Side-No Net" (solid, remove dead copper, pour order 83): 62.74,41.348 62.74,22.606 70.612,22.606 70.612,26.616 80.898,26.616 81.094,27.089 80.963,27.749 76.2,32.512 76.2,41.348
GND on Component Side "Component Side-No Net" (solid, pour order 81): 69.596,33.528 72.898,33.528 73.152,33.274 73.152,30.734 73.152,29.972 74.422,29.972 74.422,28.194 71.374,28.194 71.374,30.988 69.596,30.988
NEGGNDOUT on Component Side "Component Side-No Net" (solid, pour order 95): 89.154,40.386 109.474,40.386 109.474,30.48 89.154,30.48
NetC3_1 on Component Side "Component Side-No Net" (solid, pour order 96): 90.026,20.32 109.474,20.32 109.474,12.954 90.026,12.954
NetD4_2 on Component Side "Component Side-No Net" (solid, pour order 74): 77.978,38.354 82.55,38.354 82.55,28.013 81.207,28.013 77.978,31.242
GND on Component Side "Component Side-No Net" (solid, pour order 75): 71.484,19.758 71.484,28.194 76.2,28.194 76.2,26.87 75.193,26.87 73.914,25.591 73.914,19.758
GND on Component Side "Component Side-No Net" (solid, pour order 90): 61.722,14.986 61.722,20.828 73.66,20.828 73.66,14.986
NetLT1_1 on Component Side "Component Side-No Net" (solid, pour order 79): 67.564,29.841 67.564,27.795 67.928,27.632 68.173,27.387 68.173,24.584 70.612,24.584 70.612,28.579
NetC6_1 on Component Side "Component Side-No Net" (solid, pour order 71): 82.804,41.315 82.804,39.37 76.708,39.37 76.708,41.315
NEGSW on Component Side "Component Side-No Net" (solid, pour order 68): 86.47,41.393 86.47,20.266 74.024,20.266 74.024,22.597 81.898,22.597 82.152,22.851 83.93,24.629 84.438,25.137 84.438,41.393
GND on Component Side "Component Side-No Net" (solid, pour order 94): 61.468,51.562 87.122,51.562 87.122,43.434 61.468,43.434
NetC9_2 on Component Side "Component Side-No Net" (solid, pour order 88): 98.298,73.66 119.634,73.66 119.634,54.102 98.298,54.102
GNDOUT on Component Side "Component Side-No Net" (solid, pour order 86): 89.662,52.832 89.662,43.434 108.712,43.434 108.712,52.832
NetD7_1 on Component Side "Component Side-No Net" (solid, pour order 85): 97.79,73.66 90.678,73.66 90.678,56.642 91.44,55.88 97.79,55.88
24V+ on Component Side "Component Side-No Net" (solid, remove dead copper, pour order 84): 61.468,73.914 61.468,55.372 70.612,55.372 70.612,59.69 81.026,59.69 81.026,60.452 76.708,63.5 76.708,64.77 76.708,73.914
GND on Component Side "Component Side-No Net" (solid, pour order 82): 69.342,66.294 72.136,66.294 72.136,62.484 74.168,62.484 74.168,60.706 71.12,60.706 71.12,63.754 69.342,63.754
NetLT2_1 on Component Side "Component Side-No Net" (solid, pour order 80): 66.793,63.05 66.793,57.912 70.866,57.912 70.866,61.363
GND on Component Side "Component Side-No Net" (solid, pour order 78): 71.628,49.53 71.628,60.794 75.946,60.794 75.946,59.69 74.829,59.69 73.914,58.775 73.914,49.53
NetC13_1 on Component Side "Component Side-No Net" (solid, pour order 72): 83.566,73.914 83.566,71.12 77.216,71.12 77.216,73.914
SW on Component Side "Component Side-No Net" (solid, pour order 70): 87.122,73.914 87.122,53.086 74.676,53.086 74.676,55.118 82.55,55.118 82.804,55.372 84.582,57.15 85.09,57.658 85.09,73.914
NetD8_2 on Component Side "Component Side-No Net" (solid, pour order 63): 78.486,70.866 78.486,63.246 83.058,63.246 83.058,70.866
ISENSE_2 on Component Side "Component Side-No Net" (solid, pour order 62): 60.198,73.914 60.198,65.532 58.893,65.532 56.134,65.532 56.134,66.675 56.134,73.914
ISENSE_1 on Component Side "Component Side-No Net" (solid, pour order 77): 51.054,18.649 51.054,50.628 47.244,50.628 47.244,18.649
+5V on Component Side "Component Side-No Net" (solid, pour order 53): 27.432,33.274 39.37,33.274 39.37,33.782 39.37,40.386 27.432,40.386
NetC3_1 on Component Side "Component Side-No Net" (solid, pour order 54): 112.776,50.292 119.888,50.292 119.888,46.449 120.904,45.433 120.904,36.83 112.776,36.83
NEGGNDOUT on Component Side "Component Side-No Net" (solid, pour order 58): 98.298,21.844 98.298,22.828 98.552,23.082 100.838,25.368 100.838,31.242 109.474,31.242 109.474,21.844
-LV on Component Side "Component Side-No Net" (solid, pour order 59): 121.92,44.483 121.92,45.433 122.936,46.449 122.936,46.736 122.936,50.292 124.968,50.292 125.984,50.292 126.746,51.054 127.508,51.054 127.762,51.054 128.524,50.292 128.524,47.498 128.524,46.99 127.762,46.228 125.984,44.45 124.968,44.45
+LV on Component Side "Component Side-No Net" (solid, pour order 64): 120.65,60.231 120.725,60.156 121.342,60.156 121.454,60.156 122.682,58.928 122.682,55.372 124.714,55.372 125.476,54.61 127.762,54.61 128.524,55.372 128.524,59.436 126.492,59.436 124.714,61.214 124.681,61.181 120.65,61.181
+5V on Bottom Layer "Component Side-No Net" (solid, shelved, pour order 93): 29.419,29.718 63.5,29.718 63.5,28.448 29.419,28.448
NEGGNDOUT on Bottom Layer "Component Side-No Net" (solid, pour order 91): 89.281,39.878 103.632,39.878 103.632,12.954 89.281,12.954
GND on Bottom Layer "Component Side-No Net" (solid, pour order 92): 22.352,73.66 87.122,73.66 87.122,13.208 28.956,13.208 22.352,19.812
GNDOUT on Bottom Layer "Component Side-No Net" (solid, pour order 87): 102.616,73.914 102.616,43.942 89.662,43.942 89.662,73.914
+5V on Bottom Layer "Component Side-No Net" (solid, pour order 55): 38.862,34.29 38.862,41.402 27.94,41.402 27.686,41.148 27.686,34.29
-LV on Bottom Layer "Component Side-No Net" (solid, pour order 66): 126.746,51.054 127.762,51.054 128.524,50.292 128.524,46.99 127.762,46.228 117.268,46.228 116.76,46.736 116.84,46.816 116.84,51.054
NEGGNDOUT on Bottom Layer "Component Side-No Net" (solid, pour order 69): 103.542,39.878 107.188,39.878 112.268,44.958 125.476,44.958 127.508,44.958 129.032,46.482 129.286,46.736 129.286,52.07 129.794,52.578 130.556,52.578 131.318,51.816 131.826,51.308 131.826,36.83 131.064,36.068 111.252,36.068 110.49,35.306 110.49,16.51 106.934,12.954 103.632,12.954
+LV on Bottom Layer "Component Side-No Net" (solid, pour order 73): 128.524,55.372 128.524,59.436 116.506,59.436 116.506,55.706 117.348,54.864 117.602,54.61 127.762,54.61
GNDOUT on Bottom Layer "Component Side-No Net" (solid, pour order 76): 129.286,53.848 129.794,53.34 130.556,53.34 131.572,54.356 131.572,57.404 131.572,59.69 129.032,62.23 123.444,73.914 109.025,73.914 102.089,73.914 102.14,62.198 102.108,62.23 101.854,61.976 101.854,43.942 106.172,43.942 109.22,46.99 111.76,49.53 111.76,56.642 116.078,60.96 127.508,60.96 128.524,60.96 129.286,60.198

## Other copper
Component Side:
  pour cut-out: 47.752,22.606 46.482,22.606 46.482,41.91 46.736,42.164 47.752,42.164
  pour cut-out: 55.88,33.02 55.88,43.434 54.356,43.434 51.054,43.434 51.054,33.02
  pour cut-out: 77.293,26.616 76.254,26.616 76.2,26.67 76.2,28.453 77.211,28.453 77.293,28.371
  pour cut-out: 75.946,59.69 76.962,59.69 76.962,60.96 76.112,60.96 75.946,60.794
  pour cut-out: 51.816,33.274 51.816,23.368 51.054,23.368 51.054,33.274
  pour cut-out: 55.372,74.168 56.388,74.168 56.388,57.404 56.134,57.658 55.372,57.658
  pour cut-out: 48.391,58.651 48.391,57.535 48.26,57.404 56.388,57.404 56.388,58.674

## Silkscreen, mask and mechanical layers (free items; w line width, h text height)
Top Overlay:
  drawing of 1087 lines, arcs and shapes, not listed
  text "HEP" at 65.38,41.504 h0.8
  text "Rev. 2.0 May 2015" at 29.718,12.7 h0.8
  text "G-2 LV Power supply" at 43.942,12.7 h0.8
  text "https://goo.gl/EopGqf" at 29.718,10.922 h0.8
Mechanical 6:
  the board outline again, w0.5

## Text inside footprints (layer, text, board x,y; h text height)
AU1: Top Overlay "3" at 31.979,41.91 h1.26 r180; Top Overlay "4" at 31.115,35.052 h1.26 r180; Top Overlay "1" at 36.473,41.91 h1.26 r180; Top Overlay "2" at 34.311,41.919 h1.26 r180
J1: Top Overlay "1" at 123.801,58.622 h1.5 r270; Top Overlay "5" at 123.801,47.792 h1.5 r270; Top Overlay "9" at 133.201,49.177 h1.5 r270; Top Overlay "6" at 133.201,57.487 h1.5 r270
J2: Mechanical 2 ">Name" at 119.38,23.216 h1.97 r90; Mechanical 4 ">Value" at 140.152,23.52 h1.97 r90; Mechanical 14 "PCB Edge" at 136.652,41.148 h1.97 r90